# Altium PCB main.PcbDoc
Units mm, origin at the board's own origin, x right, y up, seen from the top; angles counter-clockwise.
Board outline 29 x 29 mm, 2 copper layers (Top copper, Bottom copper), stack 1.548 mm thick; 5 components, 1 nets, 36 pads, 0 vias.
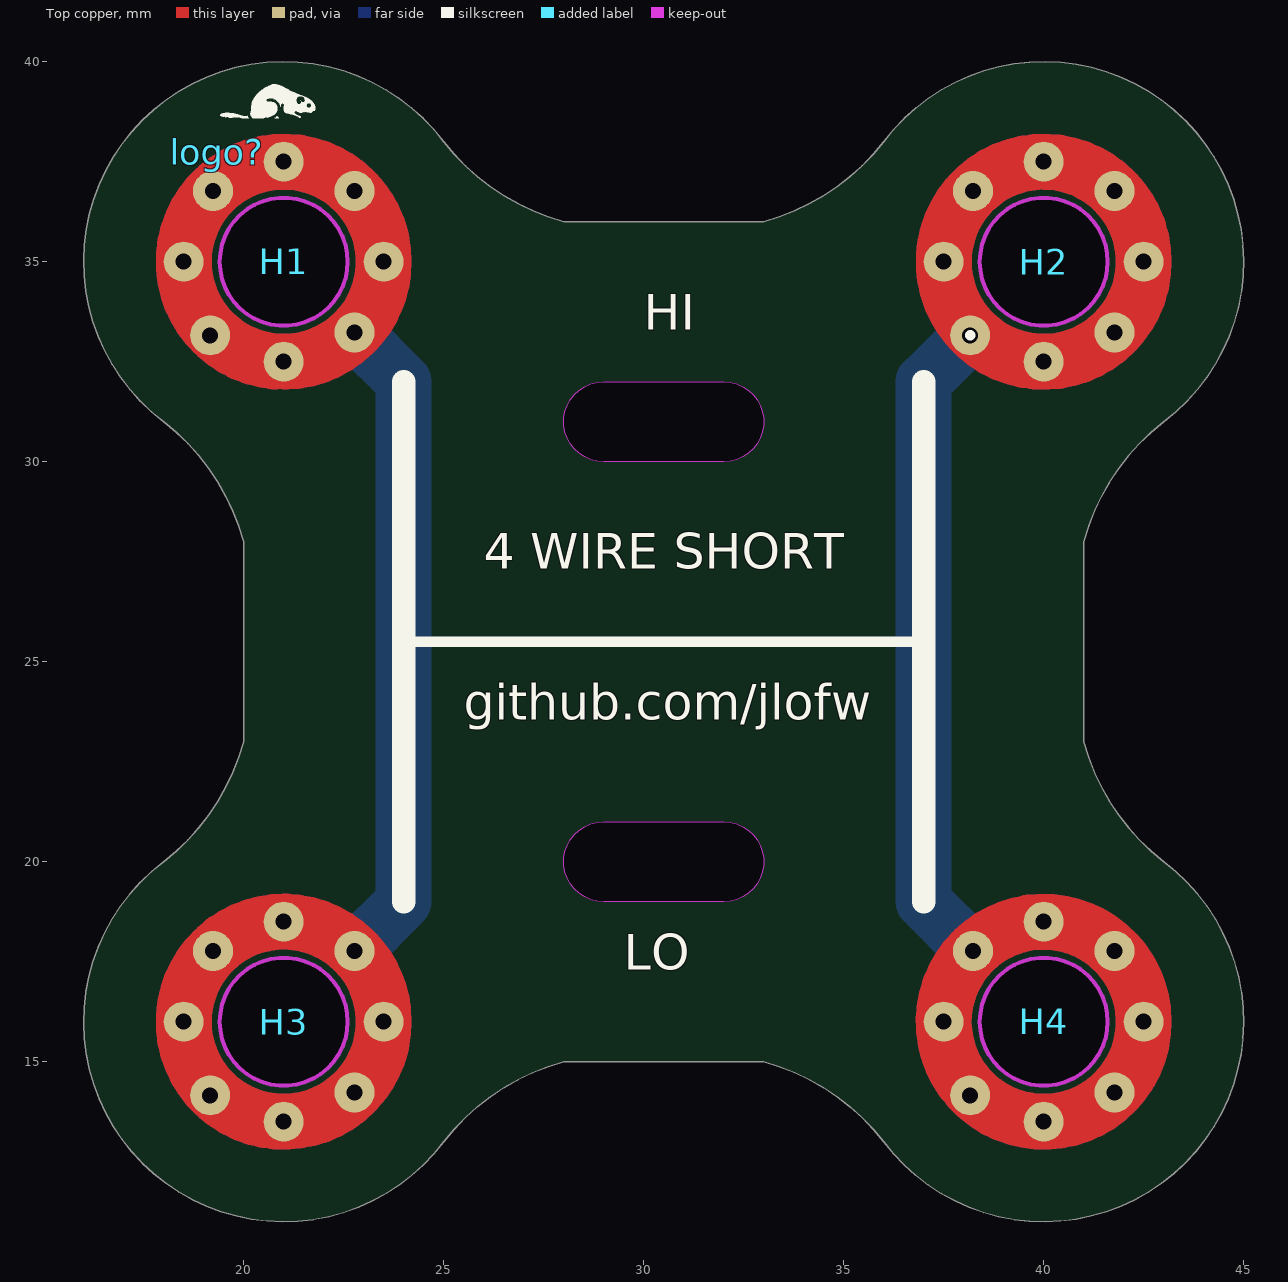
[diagram p0: Top copper view]
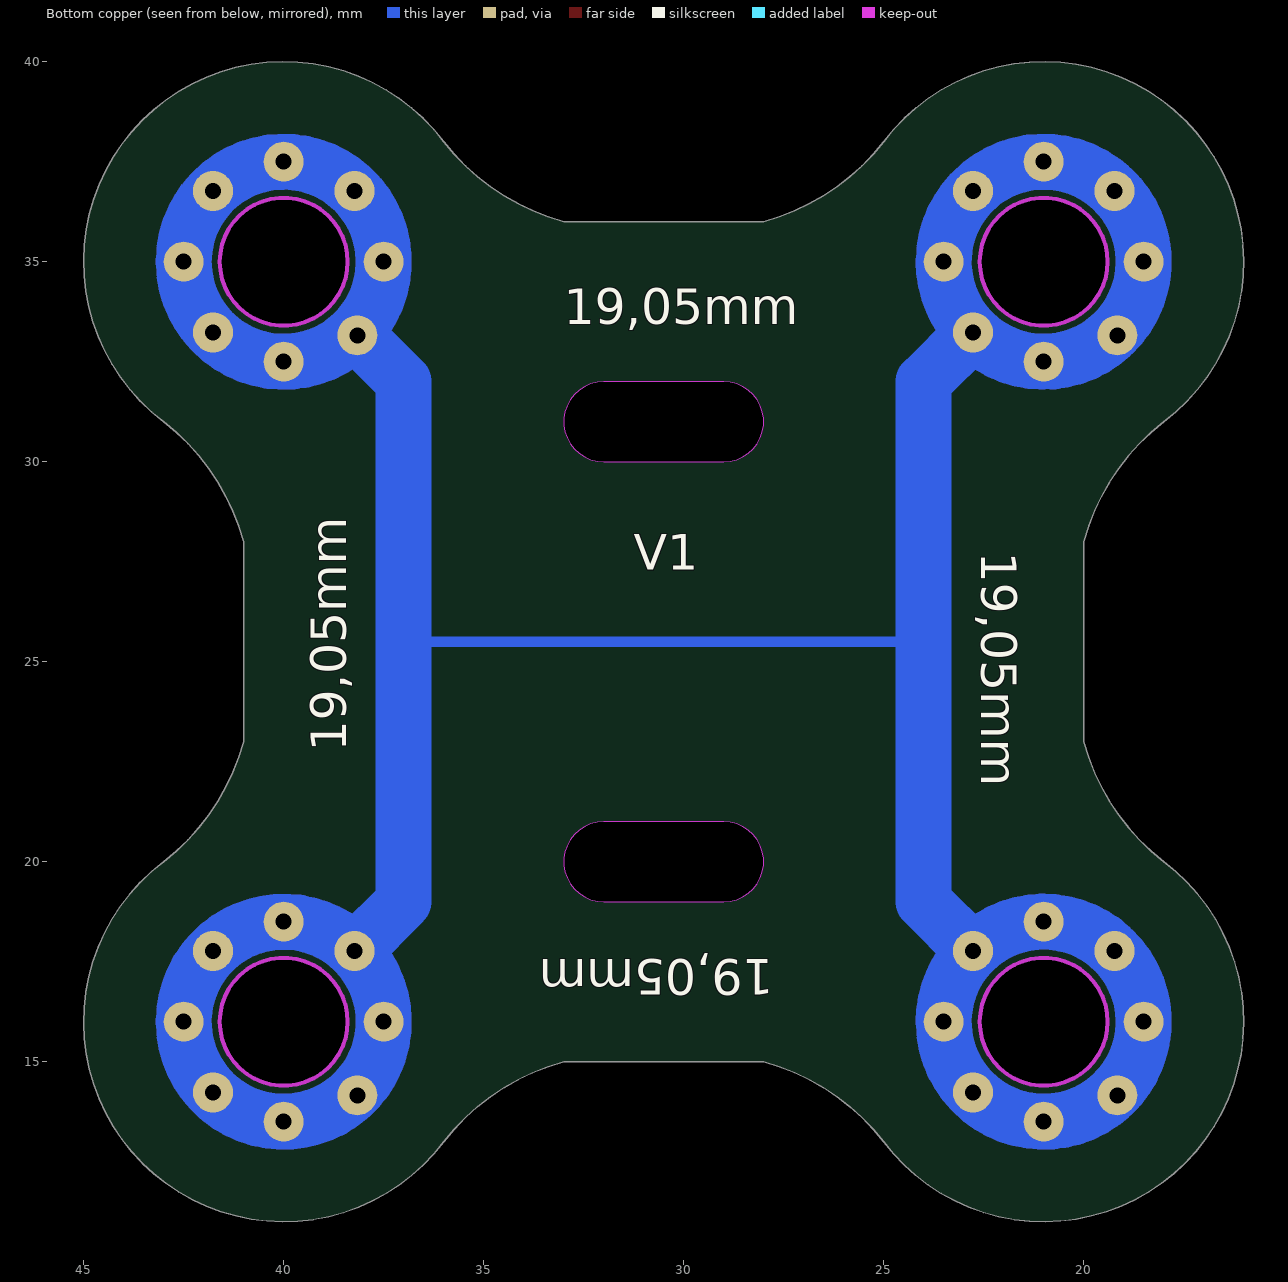
[diagram p1: Bottom copper view, seen from below]

## Layer stack, top to bottom
Top Solder: solder mask 0.0102, Solder Resist, Dk 3.5
Top copper: signal copper 0.018
Dielectric 4: prepreg 0.078, PP-006, Dk 3.9
Dielectric 2: prepreg 0.078, PP-006, Dk 3.9
Dielectric 1: dielectric 1.2, FR-4, Dk 4.4
Dielectric 3: prepreg 0.078, PP-006, Dk 3.9
Dielectric 5: prepreg 0.078, PP-006, Dk 3.9
Bottom copper: signal copper 0.018
Bottom Solder: solder mask 0.0102, Solder Resist, Dk 3.5

## Board outline
18,20 ccw(c14.5,24.5) 20,23 20,28 ccw(c14.5,26.5) 18,31 cw(c21,35) 25,38 ccw(c29.5,41.5) 28,36 33,36 ccw(c31.5,41.5) 36,38 cw(c40,35) 43,31 ccw(c46.5,26.5) 41,28 41,23 ccw(c46.5,24.5) 43,20 cw(c40,16) 36,13 ccw(c31.5,9.5) 33,15 28,15 ccw(c29.5,9.5) 25,13 cw(c21,16)
cut-out: 29,19 cw(c29,20) 29,21 32,21 cw(c32,20) 32,19
cut-out: 29,30 cw(c29,31) 29,32 32,32 cw(c32,31) 32,30

## Design rules (kind name [scope] priority, off if disabled: settings)
Clearance [All] p1: gap=0.2 ignorepadtopadclearanceinfootprint=TRUE except(0.1: Arc-Arc Arc-Track Track-Track)
PolygonConnect [All] p1: connectstyle=Relief reliefconductorwidth=0.254 reliefentries=4 polygonreliefangle="90 Angle" airgapwidth=0.254
RoutingVias [All] p1: holewidth=0.711 width=1.27 viastyle="Through Hole" minholewidth=0.711 minwidth=1.27 maxholewidth=0.711 maxwidth=1.27
SolderMaskExpansion [All] p1: expansion=0.102 istentingtop=FALSE
Width [All] p1: maxlimit=1.5 minlimit=0.2 preferedwidth=0.5
30 further rules are at their usual default settings.

## Components (designator, comment, footprint, x,y, rotation, side; value= is the part's Value field where it differs from the comment)
H1 "Plated M3" MountingHole_3.2mm_M3_Pad_Via_Unplated#1 21,35 r0 top
H2 "Plated M3" MountingHole_3.2mm_M3_Pad_Via_Unplated#2 40,35 r0 top
H3 "Plated M3" MountingHole_3.2mm_M3_Pad_Via_Unplated#1 21,16 r0 top
H4 "Plated M3" MountingHole_3.2mm_M3_Pad_Via_Unplated#1 40,16 r0 top
logo? "beaver" beaver 19.329,37.744 r0 top

## Footprints (in the part's own frame and the unit in brackets; to place one, negate y for a bottom-side part, rotate by r counter-clockwise, add the part's x,y. Pads: shape width x height; smd on the part's side, far side on the other; paste and mask are expansions set on the pad)
beaver [mm]
  silkscreen extent 0.08,0.85 2.46,1.69
MountingHole_3.2mm_M3_Pad_Via_Unplated#1 [mm] "Unplated M3 mounting hole with pad and vias"
  round 1 hole 0.4: 1(-2.5,0) 1(-1.838,-1.838) 1(-1.768,1.768) 1(0,-2.5) 1(0,2.5) 1(1.768,-1.768) 1(1.768,1.768) 1(2.5,0)
  round 3.2 hole 3.2 unplated mask+1.6: ""(0,0)
  Keep-Out Layer circle w0.1: c0,0 r1.6
  Multi-Layer lines w1.4: 1.768,-1.768 ccw(c0,0) 2.5,0 ccw(c0,0) 1.768,-1.768
MountingHole_3.2mm_M3_Pad_Via_Unplated#2 [mm] "Unplated M3 mounting hole with pad and vias"
  round 1 hole 0.4: 1(-2.5,0) 1(-1.838,-1.838) 1(-1.768,1.768) 1(0,-2.5) 1(0,2.5) 1(1.768,-1.768) 1(1.768,1.768) 1(2.5,0)
  round 3.2 hole 3.2 unplated mask+1.6: ""(0,0)
  Keep-Out Layer circle w0.1: c0,0 r1.6
  Multi-Layer lines w1.4: 2.5,0 ccw(c0,0) 2.5,0

## Part data
H1 H2 H3 H4: library part 2, Internal Number=2
logo?: library part 4, Internal Number=4

## Nets (pads, with @x,y where several pads share a name; then routed paths per layer and width w, separated by ;. In a path a pad name is that pad's centre, name@x,y a point inside that pad or via, vN(x,y) a via of type N, cw(c..) or ccw(c..) an arc to the next point about the centre after c; other vN are vias at no path point)
Short: H1.1 H2.1 H3.1 H4.1 | length 45.9
  Bottom copper w0.254: 24,25.5 37,25.5
  Bottom copper w1.4: H3.1@22.768,17.768 24,19 24,25.5 24,32 H1.1@22.768,33.232 ; H2.1@38.162,33.162 37,32 37,25.5 37,19 H4.1@38.232,17.768
pads on no net: H1. H2. H3. H4.

## Silkscreen, mask and mechanical layers (free items; w line width, h text height)
Top Overlay:
  lines w0.254: 24,25.5 37,25.5 ; 38.162,33.162 38.162,33.162
  lines w0.58: 24,19 24,32 ; 37,19 37,32
  text "HI" at 30,33 h1.52
  text "4 WIRE SHORT" at 26,27.019 h1.52
  text "github.com/jlofw" at 25.5,23.247 h1.52
  text "LO" at 29.5,17 h1.52
Bottom Overlay:
  text "19,05mm" at 32.999,33.139 h1.52
  text "19,05mm" at 22.861,27.749 h1.52 r90
  text "V1" at 31.25,27 h1.52
  text "19,05mm" at 38.139,22.751 h1.52 r270
  text "19,05mm" at 27.751,17.861 h1.52 r180
Mechanical 1:
  lines w0.254: 18,20 ccw(c14.5,24.5) 20,23 20,28 ccw(c14.5,26.5) 18,31 cw(c21,35) 25,38 ccw(c29.5,41.5) 28,36 33,36 ccw(c31.5,41.5) 36,38 cw(c40,35) 43,31 ccw(c46.5,26.5) 41,28 41,23 ccw(c46.5,24.5) 43,20 cw(c40,16) 36,13 ccw(c31.5,9.5) 33,15 28,15 ccw(c29.5,9.5) 25,13 cw(c21,16) 18,20 ; 29,19 cw(c29,20) 29,21 32,21 cw(c32,20) 32,19 29,19 ; 29,30 cw(c29,31) 29,32 32,32 cw(c32,31) 32,30 29,30